# Altium PCB isokey_left.PcbDoc (part 4 of 5)
Units mm, origin at the board's own origin, x right, y up, seen from the top; angles counter-clockwise.
Board outline 154.06 x 134.15 mm, 2 copper layers (Top Layer, Bottom Layer), stack 1.569 mm thick; 140 components, 88 nets, 412 pads, 257 vias.
Unrouted connection lines stored in the file: 18.
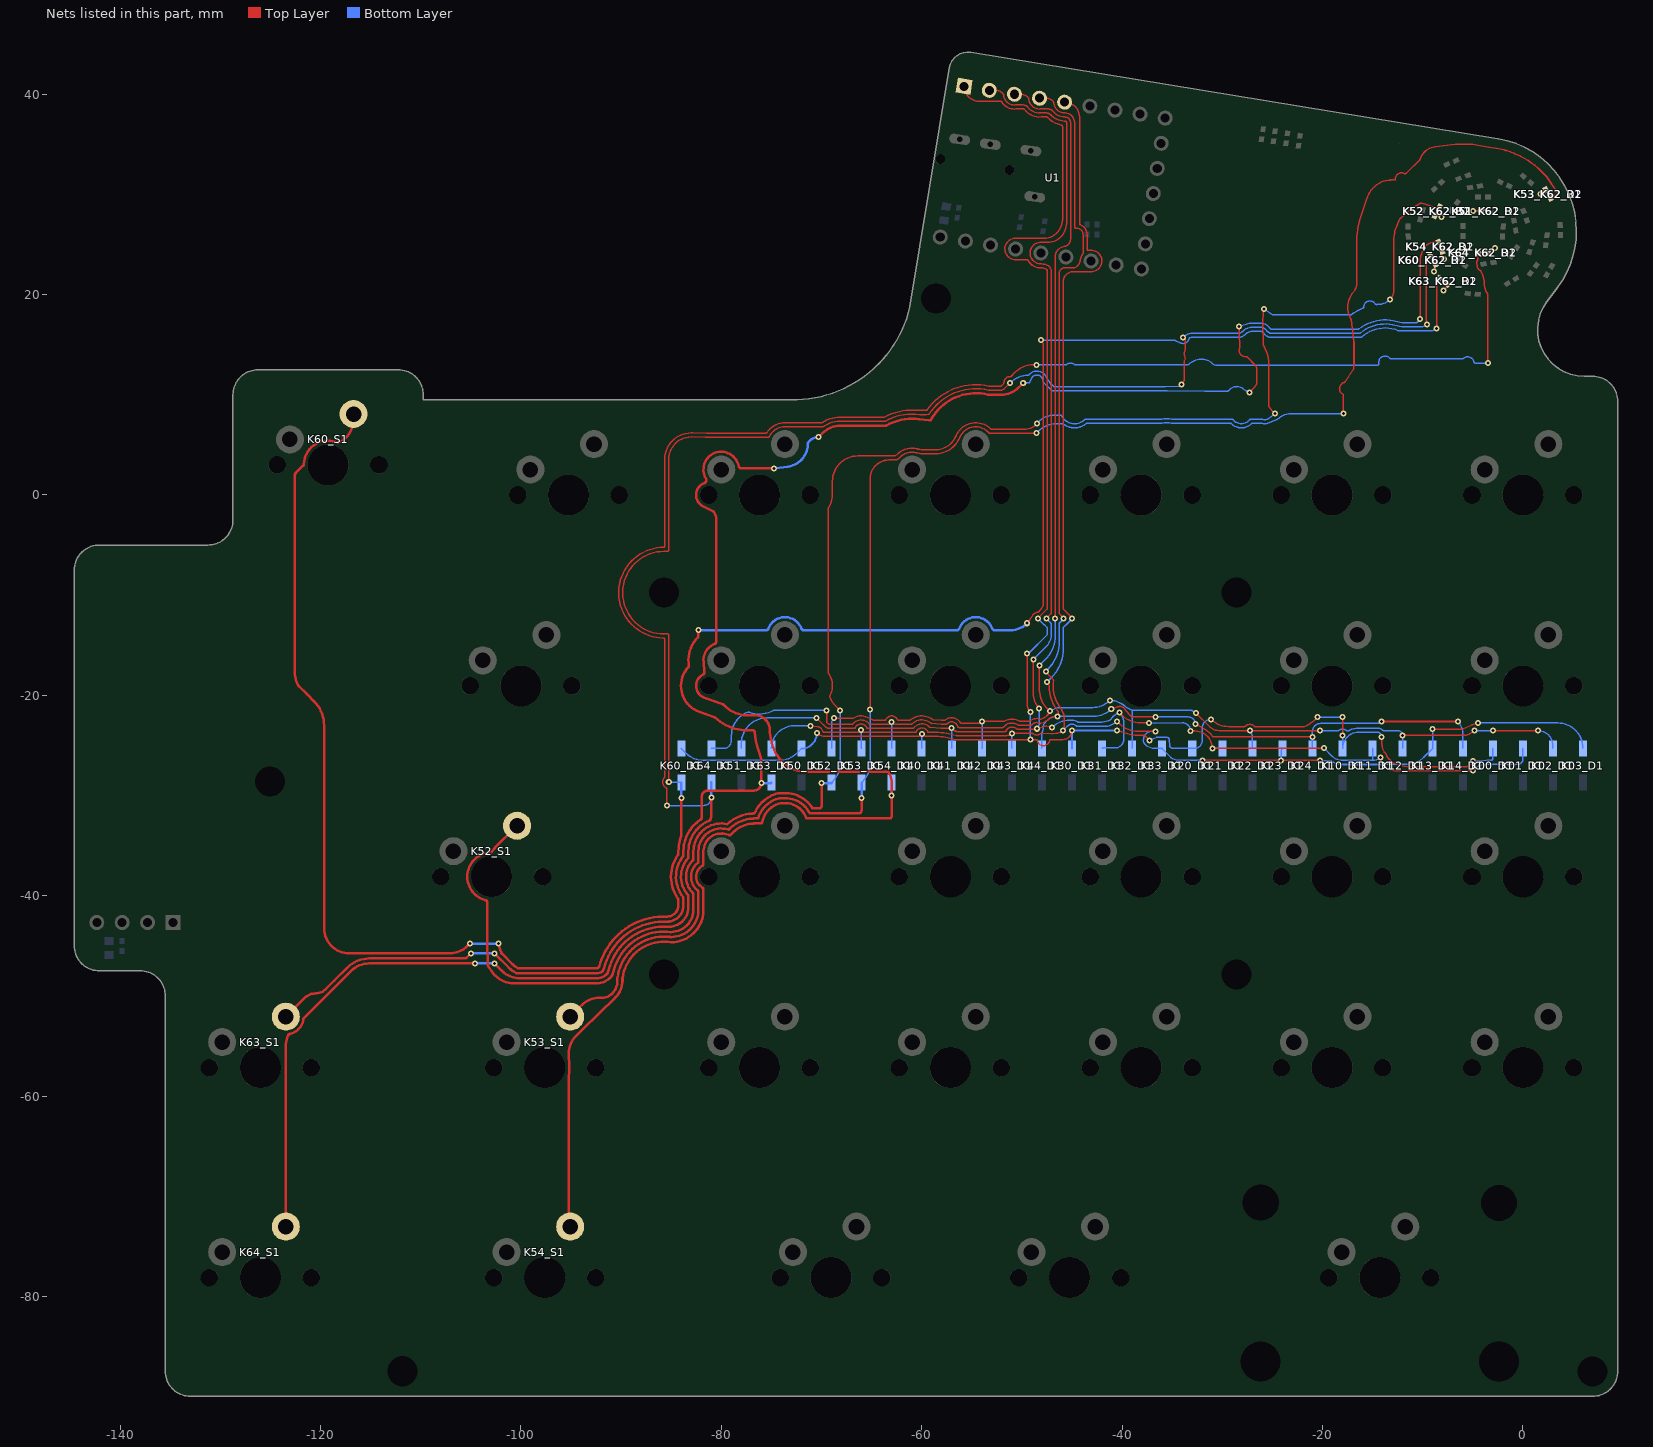
[diagram p4: the nets of this part, all layers, seen from the top]

## Via types
v1: diameter 0.6, hole 0.3, Top Layer to Bottom Layer, 257 vias

## Nets (pads, with @x,y where several pads share a name; then routed paths per layer and width w, separated by ;. In a path a pad name is that pad's centre, name@x,y a point inside that pad or via, vN(x,y) a via of type N, cw(c..) or ccw(c..) an arc to the next point about the centre after c; other vN are vias at no path point) (continued)
NetK51_K62_D2_1: K51_K62_D2.1 K51_K62_R1.2 | length 1.7
  Top Layer w0.15: v1(-4.991,28.359) -4.975,28.375 -4.151,28.375 K51_K62_D2.1@-4.144,28.382
  Bottom Layer w0.15: v1(-4.991,28.359) -4.975,28.375 -4.151,28.375 K51_K62_R1.2@-4.144,28.382
NetK52_D1_2: K52_D1.2 K52_K62_D2.2 K52_S1.2 | length 184.5
  Top Layer w0.15: v1(-68.136,-21.507) -68.579,-21.064 cw(c-66.783,-19.268) -69.162,-20.157 cw(c-69.021,-20.106) -69.155,-20.04 ccw(c-71.12,-19.05) -69.297,-17.818 cw(c-69.173,-17.735) -69.323,-17.736 -69.323,-1.314 cw(c-69.173,-1.315) -69.297,-1.232 ccw(c-71.12,0) -68.92,0 -68.92,1.36 cw(c-66.38,1.36) -66.38,3.9 -62.667,3.9 -62.292,4.201 cw(c-60.96,2.54) -60.703,4.653 cw(c-60.96,2.54) -60.395,4.593 ccw(c-59.873,6.472) -60.393,4.592 ccw(c-60.138,5.507) -60.391,4.592 ; -60.388,4.591 ccw(c-60.269,5.025) -60.385,4.59 ccw(c-60.137,5.507) -60.383,4.589 ccw(c-60.005,5.989) -60.38,4.589 ccw(c-59.873,6.472) -59.872,4.522 ; -59.871,4.522 -58.616,4.522 ccw(c-58.616,6.722) -56.587,5.87 ccw(c-58.385,6.626) -56.584,5.877 ccw(c-57.923,6.435) -56.584,5.879 ccw(c-57.46,6.244) -56.583,5.881 ccw(c-56.998,6.054) -56.582,5.883 ccw(c-57.46,6.244) -56.581,5.885 ; -56.579,5.89 cw(c-54.61,5.08) -56.385,6.256 cw(c-54.61,5.08) -53.792,7.045 cw(c-54.61,5.08) -53.124,6.605 ccw(c-53.021,6.713) -53.021,6.563 -49.82,6.563 ccw(c-49.82,8.594) -48.56,7.001 ccw(c-48.654,7.119) v1(-48.509,7.158) ; -25.929,17.955 -25.941,17.528 ccw(c-25.791,17.524) -25.941,17.522 -25.907,15.085 ccw(c-25.757,15.087) -25.896,15.03 -25.566,14.217 -25.562,14.207 cw(c-28.29,13.11) -25.35,13.11 -25.35,8.858 ccw(c-25.2,8.859) -25.326,8.777 ccw(c-23.21,10.182) -25.006,8.386 v1(-24.75,8.13) ; -25.928,17.956 cw(c-25.779,17.951) -25.928,17.968 v1(-25.858,18.556) ; v1(-13.275,19.495) ccw(c-14.209,20.429) -12.888,20.429 -12.888,25.504 cw(c-10.348,25.504) -12.863,25.858 -12.809,26.24 cw(c-11.695,26.084) -12.737,26.509 ; -12.736,26.51 -12.608,26.825 -12.39,27.358 cw(c-11.719,27.084) -12.201,27.625 -11.163,28.549 cw(c-11.064,28.437) -11.144,28.564 -10.319,29.08 cw(c-10.146,28.805) -10.2,29.126 cw(c-10.146,28.805) -10.062,29.119 -9.871,29.068 -9.579,28.989 cw(c-9.663,28.675) -9.554,28.981 -8.59,28.638 K52_K62_D2.2@-8.334,28.763
  Top Layer w0.25: K52_S1.2@-100.389,-33.014 -102.626,-35.251 ccw(c-102.449,-35.428) -102.64,-35.267 -102.908,-35.586 cw(c-103.1,-35.425) -103.083,-35.674 ccw(c-102.929,-38.094) -103.555,-40.437 cw(c-103.62,-40.679) -103.37,-40.678 -103.37,-45.603 cw(c-106.362,-46.137) -103.323,-46.137 -103.323,-46.75 ccw(c-102.648,-46.75) -103.207,-47.127 -102.929,-47.54 ccw(c-101.018,-46.252) -102.648,-47.882 -102.523,-48.006 ccw(c-100.727,-46.21) -100.727,-48.75 -92.494,-48.75 ccw(c-92.494,-46.757) -91.174,-48.25 -91.055,-48.131 ccw(c-92.059,-47.127) -90.944,-48.007 ccw(c-91.141,-47.853) -90.904,-47.931 -90.639,-47.128 ; -90.639,-47.127 cw(c-85.725,-48.75) -90.501,-46.757 cw(c-85.725,-48.75) -85.035,-43.621 ccw(c-85.035,-41.371) -82.785,-41.371 -82.785,-39.881 ccw(c-83.035,-39.881) -82.856,-39.707 -82.891,-39.671 cw(c-81.28,-38.1) -82.894,-39.668 cw(c-81.28,-38.1) -83.373,-38.926 cw(c-81.28,-38.1) -82.859,-36.497 ccw(c-83.035,-36.32) -82.785,-36.32 -82.785,-35.56 cw(c-80.01,-35.56) -79.415,-32.849 cw(c-76.686,-35.828) -76.889,-31.793 -76.868,-31.792 cw(c-76.719,-34.551) -76.719,-31.788 -76.694,-31.788 cw(c-73.66,-33.02) -75.743,-30.493 cw(c-73.66,-33.02) -75.375,-30.23 ; -75.374,-30.229 -75.164,-30.1 cw(c-73.969,-32.043) -74.107,-29.766 -73.867,-29.752 cw(c-73.66,-33.02) -70.88,-31.288 -70.25,-31.288 ccw(c-70.25,-31.038) -70,-31.038 v1(-70,-28.75)
  Bottom Layer w0.15: K52_D1.2@-69,-28.7 -68.89,-28.59 ccw(c-70.686,-26.794) -68.146,-26.794 -68.125,-22.28 ccw(c-68.75,-22.275) -68.125,-22.264 v1@-68.136,-21.502 ; v1@-68.14,-21.502 v1(-68.136,-21.507) ; v1(-48.509,7.158) -48.411,7.256 cw(c-46.615,5.46) -47.152,7.943 cw(c-47.121,7.796) -47.122,7.946 -46.149,7.946 cw(c-46.149,7.796) -46.022,7.876 -45.956,7.771 ccw(c-44.75,8.53) -45.905,7.696 ccw(c-44.75,8.53) -43.975,7.335 ccw(c-44.75,8.53) -43.752,7.513 cw(c-43.648,7.405) -43.648,7.555 -38.705,7.555 -36.094,7.555 ccw(c-36.094,7.705) -36.065,7.558 cw(c-35.56,5.08) -35.055,7.558 ccw(c-35.026,7.705) -35.026,7.555 -29.018,7.555 cw(c-29.019,7.405) -28.901,7.498 ccw(c-28.094,8.13) -27.287,7.498 cw(c-27.169,7.405) -27.17,7.555 -26.024,7.555 cw(c-26.024,7.405) -25.972,7.546 ccw(c-25.75,8.13) -25.359,7.642 v1(-24.75,8.13) ; v1(-25.858,18.556) -24.971,17.99 ccw(c-24.891,18.117) -24.891,17.967 -17.131,17.967 -16.956,18.142 ccw(c-16.957,18.292) -16.877,18.165 cw(c-13.76,13.244) -15.986,18.627 ; -15.985,18.628 ccw(c-16.043,18.766) -15.893,18.76 cw(c-15.268,18.742) -14.74,19.076 ccw(c-14.614,19.158) -14.594,19.009 ; -14.593,19.009 cw(c-13.76,13.244) -14.5,19.022 -14.497,19.022 cw(c-13.76,13.244) -14.074,19.061 ccw(c-14.084,19.21) -14.051,19.064 ccw(c-14.417,20.637) v1(-13.275,19.495)
  Bottom Layer w0.25: v1(-70,-28.75) -69.05,-28.75 K52_D1.2@-69,-28.7
NetK52_K62_D2_1: K52_K62_D2.1 K52_K62_R1.2 | length 1.4
  Top Layer w0.15: K52_K62_D2.1@-8.772,27.865 -8.54,27.941 v1(-8.138,27.745)
  Bottom Layer w0.15: K52_K62_R1.2@-8.768,27.873 -8.54,27.941 v1(-8.138,27.745)
NetK53_D1_2: K53_D1.2 K53_K62_D2.2 K53_S1.2 | length 175.4
  Top Layer w0.154: v1(-65.15,-21.399) -65.15,1.613 cw(c-63.265,1.613) -63.265,3.498 -62.665,3.498 ccw(c-62.667,4.05) -62.256,3.681 ccw(c-62.555,3.95) -62.255,3.683 cw(c-60.96,2.54) -60.759,4.255 cw(c-60.96,2.54) -60.753,4.255 ccw(c-60.703,4.653) -60.75,4.254 cw(c-60.96,2.54) -60.502,4.205 ccw(c-60.273,5.026) -60.501,4.205 ; -60.498,4.204 ccw(c-60.137,5.507) -60.495,4.203 ; -60.495,4.203 ccw(c-60.388,4.591) -60.493,4.203 ccw(c-60.269,5.025) -60.49,4.202 ccw(c-60.137,5.507) -60.487,4.201 ccw(c-60.005,5.989) -60.485,4.2 ccw(c-59.873,6.472) -59.872,4.12 ; -59.871,4.12 -58.616,4.12 ccw(c-58.616,6.722) -56.216,5.715 ccw(c-58.385,6.626) -56.213,5.722 ccw(c-57.923,6.435) -56.212,5.724 ccw(c-57.46,6.244) -56.211,5.727 ccw(c-56.998,6.054) -56.211,5.728 ccw(c-56.582,5.883) -56.21,5.73 ; -56.209,5.734 ccw(c-56.997,6.057) -56.208,5.735 ccw(c-57.459,6.248) -56.207,5.736 ; -56.207,5.737 cw(c-54.61,5.08) -56.155,5.851 cw(c-54.61,5.08) -54.61,6.807 cw(c-54.61,5.08) -53.263,6.161 -48.579,6.161 ccw(c-48.579,6.197) v1(-48.553,6.172) ; v1(-17.91,8.13) -17.91,9.942 ccw(c-18.064,9.942) -17.987,10.075 cw(c-17.675,10.619) -17.843,11.223 ccw(c-17.886,11.371) -17.758,11.285 -16.899,12.557 ccw(c-18.994,12.985) -16.856,12.985 -16.856,15.163 ccw(c-17.01,15.163) -16.857,15.182 -16.932,15.798 cw(c-16.533,15.847) -16.933,15.8 ; -16.933,15.802 -17.143,17.511 ccw(c-17.296,17.493) -17.164,17.573 cw(c-15.268,18.742) -17.058,20.066 -16.758,20.472 ccw(c-16.881,20.564) -16.743,20.495 ccw(c-18.322,21.271) -16.593,20.947 ccw(c-16.745,20.975) -16.591,20.974 -16.562,25.769 cw(c-11.62,25.758) -16.335,27.239 cw(c-11.62,25.758) -16.309,27.318 ; -16.309,27.319 -15.513,29.709 cw(c-13.112,28.91) -15.511,29.716 cw(c-15.129,29.589) -15.51,29.719 cw(c-13.112,28.91) -13.194,31.439 -13.084,31.443 cw(c-12.99,28.818) -12.732,31.432 cw(c-12.113,31.529) -11.818,32.082 ccw(c-11.747,32.219) -11.649,32.101 ccw(c-12.113,32.651) -11.604,32.142 -10.302,33.443 -10.2,33.678 cw(c-8.524,32.951) -8.73,34.766 -6.732,34.995 cw(c-6.621,34.05) -6.621,35.002 -5.129,35.002 cw(c-5.129,34.2) -4.999,34.991 -4.496,34.909 cw(c-4.647,33.969) -4.488,34.908 -3.384,34.727 -2.7,34.616 cw(c-2.853,33.676) -2.657,34.608 cw(c-2.739,34.214) -2.655,34.607 cw(c-2.821,33.823) -2.651,34.607 -1.873,34.439 cw(c-2.076,33.509) -1.823,34.427 cw(c-1.93,34.039) -1.821,34.426 cw(c-2.076,33.509) -1.786,34.415 cw(c-2.03,33.651) -1.78,34.414 -1.69,34.384 -1.598,34.354 -1.233,34.236 ; -1.231,34.236 cw(c-1.355,33.853) -1.23,34.236 cw(c-1.525,33.331) -1.185,34.22 -0.836,34.085 cw(c-1.034,33.57) -0.818,34.078 cw(c-0.976,33.708) -0.817,34.078 cw(c-0.974,33.708) -0.813,34.076 -0.572,33.97 -0.282,33.843 cw(c-0.503,33.337) -0.234,33.819 cw(c-0.43,33.468) -0.231,33.817 0.452,33.432 cw(c0.182,32.951) 0.501,33.401 0.684,33.272 0.912,33.111 0.95,33.083 1.161,32.934 cw(c1.072,32.808) 1.172,32.926 1.173,32.925 1.518,32.625 cw(c1.417,32.509) 1.526,32.618 2.378,31.766 3.417,30.206 cw(c3.288,30.121) 3.427,30.188 3.505,30.028 3.092,29.896 ccw(c3.139,29.749) 3.031,29.858 K53_K62_D2.2@2.766,29.594
  Top Layer w0.25: K53_S1.2@-95.086,-52.07 -93.949,-50.933 cw(c-92.153,-52.729) -92.153,-50.189 -91.904,-50.189 ccw(c-91.904,-48.775) -90.904,-49.775 ccw(c-92.201,-48.478) -90.367,-48.478 -90.367,-48.19 cw(c-85.725,-48.75) -85.102,-44.117 ; -85.1,-44.117 ccw(c-85.035,-43.621) -85.033,-44.121 ccw(c-85.035,-41.371) -82.315,-41.778 -82.285,-41.579 ; -82.285,-41.578 -82.285,-40.821 -82.285,-39.658 ccw(c-82.535,-39.658) -82.374,-39.466 -82.406,-39.44 cw(c-81.28,-38.1) -82.408,-39.438 cw(c-81.28,-38.1) -82.285,-36.667 -82.285,-35.56 cw(c-80.01,-35.56) -82.108,-34.681 cw(c-80.01,-35.56) -79.35,-33.383 -79.271,-33.407 -79.189,-33.325 cw(c-76.686,-35.828) -78.815,-33 cw(c-76.686,-35.828) -76.864,-32.293 -76.841,-32.291 cw(c-76.719,-34.551) -76.719,-32.288 -76.337,-32.288 -76.335,-32.282 ; -76.335,-32.282 cw(c-73.66,-33.02) -75.113,-30.656 -74.901,-30.526 cw(c-73.969,-32.043) -73.969,-30.262 cw(c-73.66,-33.02) -71.173,-31.788 -67.956,-31.788 cw(c-67.952,-32.788) -67.952,-31.788 -66.283,-31.788 ccw(c-66.284,-31.538) -66.041,-31.597 ccw(c-67.5,-31.25) -66,-31.25 v1(-66,-30.25)
  Bottom Layer w0.154: K53_D1.2@-66,-28.7 -65.894,-28.594 ccw(c-67.69,-26.798) -65.15,-26.798 v1(-65.15,-21.399) ; v1(-48.553,6.172) -48.362,6.363 cw(c-46.566,4.567) -46.566,7.107 -45.947,7.107 cw(c-45.948,6.953) -45.856,7.076 ccw(c-44.75,8.53) -44.665,6.705 ccw(c-44.75,8.53) -43.59,7.119 cw(c-43.493,6.999) -43.494,7.153 -36.31,7.153 -36.053,7.153 ccw(c-36.053,7.307) -36.02,7.157 cw(c-35.56,5.08) -35.1,7.157 ccw(c-35.067,7.307) -35.067,7.153 -29.199,7.153 cw(c-29.199,6.999) -29.092,7.11 ccw(c-28.094,8.13) -27.096,7.11 cw(c-26.989,6.999) -26.99,7.153 -26.089,7.153 cw(c-26.09,6.999) -26.046,7.147 ccw(c-25.75,8.13) -25.338,7.189 -24.5,7.555 ccw(c-24.75,8.13) -24.243,7.761 cw(c-24.119,7.67) -24.206,7.797 cw(c-23.112,6.167) -23.112,8.13 v1(-17.91,8.13)
  Bottom Layer w0.25: v1(-66,-30.25) K53_D1.2@-66,-28.7
NetK53_K62_D2_1: K53_K62_D2.1 K53_K62_R1.2 | length 1.9
  Top Layer w0.15: v1(1.748,30.021) 1.8,30.021 2.088,30.309 2.113,30.309 2.236,30.185 K53_K62_D2.1@2.279,30.467
  Bottom Layer w0.15: v1(1.748,30.021) 1.8,30.021 2.088,30.309 2.113,30.309 2.236,30.185 K53_K62_R1.2@2.279,30.467
NetK54_D1_2: K54_D1.2 K54_K62_D2.2 K54_S1.2 | length 217.1
  Top Layer w0.15: v1(-28.34,16.818) -28.288,16.23 cw(c-28.437,16.217) -28.287,16.218 ; -28.287,16.167 -28.257,14.762 ; -28.287,16.168 cw(c-28.137,16.17) -28.287,16.169 -28.287,16.217 ; -28.257,14.761 cw(c-28.407,14.76) -28.269,14.701 -28.28,14.676 ccw(c-27.705,14.43) -28.222,14.079 -28.221,14.078 ccw(c-28.097,14.163) -28.194,14.049 cw(c-28.593,13.567) -28.1,13.952 ccw(c-27.983,14.045) -28.072,13.925 ccw(c-27.705,14.43) -28.071,13.924 ccw(c-27.705,14.43) -27.668,13.807 -27.63,13.809 cw(c-27.621,13.659) -27.517,13.767 -27.516,13.766 -26.604,12.853 cw(c-28.69,12.378) -26.55,12.378 -26.55,11.153 cw(c-26.7,11.154) -26.571,11.078 cw(c-28.754,12.377) -26.957,10.581 v1(-27.287,10.251) ; v1(-10.249,17.554) -10.249,23.316 cw(c-7.877,23.316) -9.554,24.993 cw(c-8.683,23.685) -8.683,25.256 K54_K62_D2.2@-8.398,25.256
  Top Layer w0.25: -95.242,-58.417 -95.242,-72.649 ccw(c-94.709,-72.649) K54_S1.2@-95.086,-73.026 ; -95.242,-58.417 -95.202,-57.235 ccw(c-97.626,-57.15) -95.202,-57.071 -95.242,-55.786 cw(c-94.992,-55.778) -95.242,-55.778 cw(c-92.702,-55.778) -94.498,-53.982 -93.949,-53.433 ccw(c-95.086,-52.07) -93.847,-53.341 -90.57,-50.148 ccw(c-91.904,-48.775) -90.55,-50.128 ccw(c-92.201,-48.478) -90.275,-49.797 -90.206,-49.696 cw(c-89.999,-49.837) -90.177,-49.661 -90.176,-49.66 ccw(c-90.26,-49.576) -90.141,-49.576 ; -90.186,-49.656 ccw(c-92.201,-48.478) -89.867,-48.478 -89.867,-48.236 cw(c-89.617,-48.237) -89.865,-48.206 ; -89.864,-48.204 cw(c-85.725,-48.75) -86.981,-44.768 cw(c-85.725,-48.75) -85.037,-44.632 ; -85.036,-44.632 ccw(c-84.996,-44.386) -84.995,-44.636 ccw(c-85.016,-41.404) -81.874,-42.158 -81.785,-41.786 -81.785,-41.404 -81.785,-39.395 ccw(c-82.035,-39.396) -81.908,-39.181 cw(c-81.28,-38.1) -81.908,-37.019 ccw(c-82.035,-36.804) -81.785,-36.805 -81.785,-35.56 cw(c-80.01,-35.56) -79.496,-33.861 -79.272,-33.929 ccw(c-79.2,-33.689) -79.195,-33.939 -79.133,-33.938 cw(c-79.128,-34.188) -79.128,-33.938 -79.095,-33.938 -78.837,-33.68 cw(c-76.686,-35.828) -76.84,-32.792 -76.813,-32.791 cw(c-76.719,-34.551) -76.719,-32.788 -75.956,-32.788 -75.853,-32.416 cw(c-73.66,-33.02) -71.564,-32.137 ; v1(-74.736,2.667) -78.022,2.667 cw(c-78.02,2.917) -78.266,2.869 ccw(c-80.01,2.54) -81.37,3.681 ccw(c-80.01,2.54) -81.532,1.626 cw(c-81.746,1.498) -81.51,1.417 cw(c-83.91,2.249) -81.544,1.323 cw(c-81.777,1.415) -81.693,1.18 ccw(c-81.28,0) -82.529,0.037 ccw(c-81.28,0) -82.486,-0.329 ccw(c-81.28,0) -81.838,-1.119 ccw(c-81.28,0) -81.835,-1.12 ccw(c-81.28,0) -81.833,-1.121 -80.838,-1.612 cw(c-80.949,-1.836) -80.743,-1.694 cw(c-81.835,-2.445) -80.51,-2.445 -80.51,-4 -80.51,-12.321 -80.51,-14.629 cw(c-80.76,-14.629) -80.667,-14.861 ccw(c-80.01,-16.51) -81.78,-16.639 -81.704,-17.691 cw(c-81.953,-17.709) -81.838,-17.931 -81.839,-17.932 ccw(c-81.28,-19.05) -81.702,-20.227 -79.836,-20.895 cw(c-79.92,-21.131) -79.734,-20.964 cw(c-79.92,-21.131) -79.733,-20.965 ccw(c-77.47,-18.935) -77.47,-21.975 -76.656,-21.975 cw(c-76.656,-23.471) -75.16,-23.471 -75.16,-23.51 ccw(c-71.12,-23.51) -75.135,-23.958 ccw(c-71.12,-23.51) -74.948,-24.8 ccw(c-74.474,-24.642) -74.948,-24.802 -74.814,-25.198 ccw(c-74.34,-25.038) -74.814,-25.2 ccw(c-71.46,-24.066) -73.517,-26.947 ccw(c-73.225,-26.541) -73.515,-26.948 -73.385,-27.041 ccw(c-73.095,-26.634) -73.384,-27.042 ccw(c-71.62,-24.566) -71.62,-27.606 -63.471,-27.606 cw(c-63.472,-27.856) -63.251,-27.738 cw(c-65.138,-28.744) -63,-28.744 v1(-63,-30) -63,-32.038 cw(c-63.25,-32.038) -63.25,-32.288 -67.952,-32.288 ccw(c-67.952,-32.788) -67.955,-32.288 -71.506,-32.288 ccw(c-73.66,-33.02) -71.563,-32.138 ; v1(-70.292,5.791) -69.919,6.164 cw(c-68.122,4.368) -68.122,6.908 -63.606,6.908 ccw(c-63.619,7.158) -63.495,6.941 cw(c-60.96,2.54) -62.369,7.42 cw(c-60.96,2.54) -60.96,7.619 cw(c-60.96,2.54) -60.274,7.572 ccw(c-60.215,8.019) -60.253,7.57 -59.232,7.478 ; -59.232,7.483 -59.095,7.472 -58.991,7.649 cw(c-54.61,5.08) -55.937,9.983 -55.934,9.983 cw(c-54.61,5.08) -53.396,10.012 -52.098,10.012 ccw(c-52.098,12.552) -50.302,10.756 v1(-49.869,11.19)
  Bottom Layer w0.15: v1(-49.869,11.19) -49.342,11.19 ccw(c-49.342,11.34) -49.202,11.285 -49.091,11.57 cw(c-48.509,11.342) -47.884,11.344 ccw(c-47.734,11.345) -47.841,11.24 -46.983,10.382 -36.102,10.382 ccw(c-36.103,10.532) -36.089,10.383 cw(c-35.56,5.08) -35.484,10.408 -31.77,10.355 -29.513,10.355 ccw(c-29.513,10.505) -29.409,10.397 -29.264,10.538 cw(c-28.55,9.803) -27.921,10.613 -27.63,10.387 ccw(c-27.538,10.505) -27.538,10.355 cw(c-27.538,10) v1(-27.287,10.251) ; v1(-28.34,16.818) -27.466,17.084 cw(c-26.957,15.417) -26.957,17.16 -26.251,17.16 cw(c-26.251,15.96) -25.401,16.808 -25.181,16.587 ccw(c-25.074,16.692) -25.074,16.542 -16.452,16.542 ccw(c-16.453,16.692) -16.361,16.573 cw(c-13.76,13.244) -14.917,17.308 cw(c-13.76,13.244) -12.929,17.387 -12.3,17.261 -12.04,17.209 ccw(c-12.011,17.356) -12.011,17.206 -10.659,17.206 ccw(c-10.659,17.356) -10.553,17.249 v1(-10.249,17.554)
  Bottom Layer w0.25: v1(-74.736,2.667) -74.594,2.667 ccw(c-74.594,2.917) -74.562,2.669 -73.367,2.824 ccw(c-73.66,5.08) -71.495,4.382 ccw(c-73.66,5.08) -71.385,5.037 cw(c-71.135,5.031) -71.358,5.146 cw(c-70.292,4.588) v1(-70.292,5.791) ; v1(-63,-30) K54_D1.2@-63,-28.8
NetK54_K62_D2_1: K54_K62_D2.1 K54_K62_R1.2 | length 1.6
  Top Layer w0.15: K54_K62_D2.1@-8.056,24.317 -8.088,24.066 v1(-7.895,23.536)
  Bottom Layer w0.15: K54_K62_R1.2@-8.056,24.317 -8.088,24.066 v1(-7.895,23.536)
NetK60_D1_2: K60_D1.2 K60_K62_D2.2 K60_S1.2 | length 241.5
  Top Layer w0.15: v1(-85.25,-28.65) -85.25,-14.012 ccw(c-85.4,-14.013) -85.411,-13.863 cw(c-85.725,-9.75) -85.41,-5.637 ccw(c-85.4,-5.487) -85.25,-5.488 -85.25,3.567 cw(c-83.027,3.567) -83.027,5.791 -81.62,5.775 -78.621,5.775 ccw(c-78.621,8.715) -78.617,5.775 -75.333,5.777 ccw(c-75.333,5.927) -75.199,5.859 -75.188,5.88 cw(c-73.66,5.08) -73.659,6.805 cw(c-73.66,5.08) -73.624,6.805 ; -73.622,6.805 ccw(c-73.615,7.205) -73.614,6.805 -70.023,6.805 ccw(c-70.024,7.355) -70.021,6.805 -69.902,6.805 ccw(c-69.903,6.955) -69.819,6.831 cw(c-68.122,4.368) -69.73,6.89 ; -69.729,6.89 cw(c-68.122,4.368) -68.122,7.358 -63.71,7.358 ccw(c-63.711,7.508) -63.639,7.377 cw(c-60.96,2.54) -62.155,7.938 cw(c-60.96,2.54) -60.215,8.019 -59.836,8.019 ccw(c-59.836,10.559) -59.31,8.074 ccw(c-59.342,8.22) -59.217,8.136 cw(c-54.61,5.08) -57.935,9.497 cw(c-54.61,5.08) -56.055,10.417 cw(c-55.937,9.983) -56.054,10.417 cw(c-54.61,5.08) -53.359,10.466 ccw(c-53.326,10.612) -53.326,10.462 -52.098,10.462 ccw(c-52.098,12.552) -52.071,10.462 ccw(c-52.098,12.552) -52.07,10.462 ccw(c-52.073,10.612) -52.016,10.473 -51.832,10.549 ccw(c-51.889,10.688) -51.783,10.581 v1(-51.175,11.19) ; v1(-34.085,11.013) ccw(c-35.156,12.085) -33.839,11.335 ccw(c-33.97,11.409) -33.82,11.408 -33.82,12.98 cw(c-31.861,12.98) -33.72,13.598 ccw(c-33.862,13.645) -33.723,13.702 cw(c-32.774,14.088) -33.717,14.488 ccw(c-33.856,14.546) -33.706,14.546 -33.706,15.592 ccw(c-33.856,15.592) -33.856,15.742 v1(-33.931,15.742) ; v1(-9.579,17.031) cw(c-9.474,17.138) -9.624,17.137 -9.624,22.928 cw(c-8.273,22.928) K60_K62_D2.2@-9.228,23.884
  Top Layer w0.25: K60_S1.2@-116.71,8.08 -116.71,7.54 cw(c-119.25,7.54) -118.141,5.255 cw(c-118.249,5.481) -118.341,5.248 ccw(c-119.25,3) -119.25,5.425 ccw(c-119.25,3) -121.673,3.095 cw(c-121.923,3.106) -121.745,2.93 -122.487,2.188 ccw(c-122.31,2.011) -122.56,2.011 -122.56,-17.888 ccw(c-120.52,-17.888) -122.209,-19.032 ccw(c-122.003,-18.891) -122.181,-19.066 -121.373,-19.873 -120.642,-20.605 cw(c-123.023,-22.99) -119.653,-22.99 -119.653,-43.217 ccw(c-117.113,-43.217) -117.113,-45.757 -115.158,-45.757 -107.134,-45.757 ccw(c-107.134,-43.217) -105.338,-45.013 v1(-105.093,-44.769) ; v1(-102.25,-44.75) -102.003,-45.548 cw(c-102.648,-45.75) -101.981,-45.643 ccw(c-101.734,-45.603) -101.912,-45.778 -100.856,-46.835 ccw(c-99.414,-45.391) -100.318,-47.22 ccw(c-100.209,-46.995) -100.233,-47.244 ccw(c-100.095,-45.71) -100.095,-47.25 -98.573,-47.25 -93.445,-47.25 -92.494,-47.25 ccw(c-92.494,-46.757) -92.379,-47.236 ccw(c-92.438,-46.994) -92.201,-47.072 -92.064,-46.659 ; -92.064,-46.658 cw(c-90.639,-47.128) -92.064,-46.657 cw(c-85.725,-48.75) -91.886,-46.18 cw(c-85.725,-48.75) -91.581,-45.545 cw(c-85.725,-48.75) -89.223,-43.065 cw(c-85.725,-48.75) -85.424,-42.082 ccw(c-85.424,-40.943) -84.285,-40.943 -84.285,-40.425 ccw(c-84.535,-40.425) -84.331,-40.28 cw(c-81.28,-38.1) -84.331,-35.92 ccw(c-84.535,-35.775) -84.285,-35.775 -84.285,-35.56 cw(c-80.01,-35.56) -84.211,-34.77 cw(c-80.01,-35.56) -84.016,-34.066 ccw(c-84.25,-33.98) -84,-33.98 v1(-84,-30.25)
  Bottom Layer w0.15: v1(-85.25,-28.65) -84.05,-28.65 cw(c-84.05,-28.7) K60_D1.2@-84,-28.7 ; v1(-51.175,11.19) -51.152,11.212 cw(c-49.356,9.416) -49.356,11.956 -49.319,11.981 ccw(c-49.402,12.106) -49.288,12.008 cw(c-48.509,11.342) -48.318,12.349 cw(c-48.509,11.342) -47.646,11.895 -47.132,11.097 ; -47.132,11.097 ccw(c-45.422,12.806) -46.783,10.808 ccw(c-46.699,10.932) -46.7,10.782 -36.875,10.782 -35.689,10.808 cw(c-35.56,5.08) -35.678,10.808 -34.334,10.837 ccw(c-34.337,10.987) -34.243,10.87 ccw(c-35.609,12.538) v1(-34.085,11.013) ; v1(-33.931,15.742) cw(c-32.965,14.777) -32.965,16.142 -29.582,16.142 cw(c-29.583,15.992) -29.525,16.131 ; -29.524,16.13 ccw(c-29.467,16.269) -29.441,16.121 cw(c-29.211,14.862) -29.211,16.142 -28.31,16.142 ccw(c-28.31,16.292) -28.237,16.161 -28.039,16.27 ccw(c-28.34,16.818) -27.911,16.363 -27.907,16.367 ccw(c-28.01,16.476) -27.905,16.369 ; -27.904,16.37 cw(c-26.957,15.417) -26.957,16.76 -26.251,16.76 cw(c-26.251,15.96) -25.685,16.526 -25.461,16.302 ccw(c-25.074,16.692) -25.389,16.242 -25.286,16.169 ccw(c-25.2,16.292) -25.2,16.142 -16.311,16.142 ccw(c-16.311,16.292) -16.216,16.177 cw(c-13.76,13.244) -14.244,17.038 cw(c-13.76,13.244) -13.009,16.995 -12.08,16.809 ccw(c-12.05,16.956) -12.05,16.806 -10.122,16.806 ccw(c-10.122,17.574) v1(-9.579,17.031)
  Bottom Layer w0.25: v1(-105.093,-44.769) -102.269,-44.769 ccw(c-102.269,-44.75) v1(-102.25,-44.75) ; v1(-84,-30.25) K60_D1.2@-84,-28.7
NetK60_K62_D2_1: K60_K62_D2.1 K60_K62_R1.2 | length 1.5
  Top Layer w0.15: v1(-8.886,22.322) -8.886,22.444 -8.764,22.566 -8.764,22.982 K60_K62_D2.1@-8.728,23.018
  Bottom Layer w0.15: v1(-8.886,22.322) -8.886,22.444 -8.764,22.566 -8.764,22.982 K60_K62_R1.2@-8.728,23.018
NetK63_D1_2: K63_D1.2 K63_K62_D2.2 K63_S1.2 | length 196.2
  Top Layer w0.15: v1(-49.473,-12.802) -48.898,-11.969 cw(c-48.384,-12.323) -48.423,-11.7 ccw(c-48.433,-11.55) -48.327,-11.656 ccw(c-50.14,-9.877) -47.901,-11.076 ccw(c-48.034,-11.006) -47.884,-11.007 -47.884,14.942 ccw(c-48.652,14.942) v1(-48.109,15.485) ; v1(-8.606,16.631) -8.606,20.992 cw(c-7.666,20.992) K63_K62_D2.2@-8.331,21.657
  Top Layer w0.25: K63_S1.2@-123.472,-52.07 -121.614,-50.211 cw(c-120.5,-51.325) -120.5,-49.75 ccw(c-120.5,-48.325) -119.492,-49.333 -118.638,-48.478 -117.309,-47.149 cw(c-115.158,-49.297) -115.158,-46.257 -105.611,-46.257 ccw(c-105.611,-46.007) -105.435,-46.185 v1(-105,-45.75) ; v1(-102.648,-45.75) -101.21,-47.187 ccw(c-99.414,-45.391) -100.449,-47.711 ccw(c-100.348,-47.482) -100.385,-47.729 ccw(c-100.095,-45.71) -100.095,-47.75 -92.494,-47.75 ccw(c-92.494,-46.757) -91.865,-47.525 ccw(c-92.024,-47.332) -91.848,-47.51 -91.845,-47.507 ccw(c-92.022,-47.331) -91.785,-47.409 -91.747,-47.295 -91.59,-46.816 ; -91.589,-46.814 cw(c-85.725,-48.75) -88.656,-43.315 cw(c-85.725,-48.75) -85.394,-42.584 ccw(c-85.394,-40.975) -83.785,-40.975 -83.785,-40.259 ccw(c-84.035,-40.259) -83.838,-40.105 cw(c-81.28,-38.1) -84.135,-39.652 cw(c-81.28,-38.1) -83.938,-36.229 cw(c-81.28,-38.1) -83.838,-36.095 ccw(c-84.035,-35.941) -83.785,-35.941 -83.785,-35.56 cw(c-80.01,-35.56) -83.295,-33.701 cw(c-80.01,-35.56) -82.066,-32.394 ccw(c-82.203,-32.185) -81.953,-32.185 -81.953,-30.129 cw(c-81.324,-30.129) -81.324,-29.5 -76.75,-29.5 ccw(c-76.75,-28.75) v1(-76,-28.75) -76,-26.416 ccw(c-76.25,-26.416) -76.013,-26.336 -76.325,-25.413 -76.369,-25.281 cw(c-75.895,-25.122) -76.369,-25.28 cw(c-75.422,-24.962) -76.37,-25.278 ; v1(-82.285,-13.5) -82.285,-14.051 cw(c-82.535,-14.05) -82.355,-14.224 ccw(c-80.01,-16.51) -83.277,-16.745 ccw(c-82.778,-16.711) -83.276,-16.748 -83.257,-17.021 cw(c-83.506,-17.039) -83.32,-17.206 ccw(c-81.28,-19.05) -84.03,-19.05 ccw(c-81.28,-19.05) -82.211,-21.638 ccw(c-81.87,-20.697) -82.209,-21.638 ccw(c-82.039,-21.168) -82.208,-21.639 -80.684,-22.185 cw(c-80.769,-22.42) -80.608,-22.228 -80.384,-22.417 ccw(c-77.47,-18.935) -78.344,-23.39 ccw(c-77.47,-18.935) -77.47,-23.475 -76.905,-23.475 cw(c-76.906,-23.725) -76.656,-23.715 ccw(c-71.12,-23.51) -76.37,-25.278
  Bottom Layer w0.15: v1(-48.109,15.485) -48.049,15.424 -34.71,15.424 -34.679,15.41 -34.203,15.179 ccw(c-33.931,15.742) -33.322,15.6 cw(c-33.176,15.564) -33.216,15.709 cw(c-32.965,14.777) -32.965,15.742 -31.006,15.742 -29.476,15.719 ccw(c-29.467,16.269) -29.461,15.719 -28.293,15.733 ccw(c-28.295,15.883) -28.257,15.738 -28.171,15.76 ccw(c-28.31,16.292) -28.045,15.81 ; -28.045,15.81 -27.846,15.919 ccw(c-28.039,16.27) -27.843,15.921 ccw(c-28.34,16.818) -27.637,16.071 ccw(c-27.911,16.363) -27.636,16.072 -27.632,16.076 ; -27.631,16.077 ccw(c-28.01,16.476) -27.626,16.082 ccw(c-27.905,16.369) -27.624,16.084 ccw(c-27.729,16.191) -27.623,16.085 cw(c-26.957,15.417) -26.957,16.36 -26.251,16.36 cw(c-26.251,15.96) -25.969,16.244 -25.743,16.018 ; -25.742,16.017 ccw(c-25.074,16.692) -25.621,15.916 ccw(c-25.389,16.242) -25.619,15.914 -25.516,15.842 ccw(c-25.286,16.169) -25.514,15.841 ccw(c-25.2,16.292) -25.2,15.742 -16.161,15.742 ccw(c-16.162,15.892) -16.062,15.781 cw(c-13.76,13.244) -12.469,16.416 ccw(c-12.413,16.556) -12.414,16.406 -9.149,16.406 ccw(c-9.149,17.174) v1(-8.606,16.631)
  Bottom Layer w0.25: v1(-105,-45.75) v1(-102.648,-45.75) ; v1(-82.285,-13.5) -75.552,-13.5 ccw(c-75.553,-13.25) -75.319,-13.34 cw(c-73.66,-13.97) -72.001,-13.34 ccw(c-71.767,-13.25) -71.768,-13.5 -56.502,-13.5 ccw(c-56.503,-13.25) -56.269,-13.34 cw(c-54.61,-13.97) -52.951,-13.34 ccw(c-52.717,-13.25) -52.718,-13.5 -51.159,-13.5 ccw(c-51.159,-11.115) v1(-49.473,-12.802) ; v1(-76,-28.75) -75.05,-28.75 K63_D1.2@-75,-28.7
NetK63_K62_D2_1: K63_K62_D2.1 K63_K62_R1.2 | length 1.5
  Top Layer w0.15: v1(-7.928,20.422) -7.717,20.632 ccw(c-8.114,21.029) K63_K62_D2.1@-7.553,21.029
  Bottom Layer w0.15: v1(-7.928,20.422) -7.717,20.632 ccw(c-8.114,21.029) K63_K62_R1.2@-7.553,21.029
NetK64_D1_2: K64_D1.2 K64_K62_D2.2 K64_S1.2 | length 222.3
  Top Layer w0.15: v1(-85.442,-31) -85.442,-29.344 ccw(c-85.592,-29.345) -85.526,-29.211 cw(c-85.25,-28.65) -85.693,-28.209 ccw(c-85.8,-28.104) -85.65,-28.105 -85.65,-14.424 ccw(c-85.8,-14.424) -85.797,-14.274 cw(c-85.725,-9.75) -87.162,-14.041 cw(c-85.725,-9.75) -85.725,-5.225 ccw(c-85.8,-5.095) -85.65,-5.096 -85.65,3.567 cw(c-83.027,3.567) -83.027,6.191 -82.859,6.191 -81.454,6.175 -78.616,6.175 -75.562,6.177 ccw(c-75.563,6.327) -75.438,6.244 cw(c-73.66,5.08) -73.615,7.205 -70.023,7.205 ccw(c-70.024,7.355) -69.944,7.228 cw(c-68.122,4.368) -69.173,7.592 cw(c-68.122,4.368) -68.122,7.758 -63.811,7.758 ccw(c-63.812,7.908) -63.742,7.776 cw(c-60.96,2.54) -62.243,8.328 ; -62.243,8.329 cw(c-60.96,2.54) -60.513,8.452 ccw(c-60.502,8.602) -60.503,8.452 -59.564,8.452 ccw(c-59.565,8.602) -59.443,8.514 cw(c-54.61,5.08) -56.69,10.632 cw(c-54.61,5.08) -56.16,10.803 cw(c-55.937,9.983) -56.158,10.803 cw(c-54.61,5.08) -53.297,10.862 -52.153,10.862 ccw(c-52.153,11.012) -52.096,10.873 -52.057,10.889 ccw(c-52.115,11.027) -52.009,10.921 -51.797,11.133 cw(c-51.175,11.19) -51.176,11.815 ccw(c-51.178,11.965) -51.072,11.858 -50.683,12.247 cw(c-48.886,10.451) -48.886,12.991 v1(-48.56,12.991) ; K64_K62_D2.2@-4.499,24.176 -4.499,23.513 -4.564,23.36 ccw(c-4.266,23.232) -4.589,23.202 -4.554,22.812 -4.483,22.625 ccw(c-4.179,22.74) -4.283,22.432 cw(c-4.332,22.29) -4.205,22.369 cw(c-6.251,21.116) -3.861,21.334 cw(c-4.011,21.321) -3.861,21.31 ccw(c-1.942,21.162) -3.851,20.919 ccw(c-1.942,21.162) -3.612,20.205 ccw(c-2.57,20.8) -3.61,20.202 ; -3.61,20.202 -3.519,20.042 cw(c-3.649,19.968) -3.499,19.968 v1(-3.499,13.167)
  Top Layer w0.25: K64_S1.2@-123.472,-71.711 -123.472,-55.025 cw(c-120.932,-55.025) -123.225,-53.93 cw(c-123,-54.039) -123.059,-53.796 ccw(c-123.472,-52.07) -121.707,-52.254 -116.954,-47.501 cw(c-115.158,-49.297) -115.158,-46.757 v1(-104.566,-46.757) ; v1(-102.648,-46.75) -101.891,-47.506 ccw(c-100.095,-45.71) -100.095,-48.25 -92.494,-48.25 ccw(c-92.494,-46.757) -91.522,-47.89 ccw(c-91.686,-47.701) -91.51,-47.879 -91.409,-47.778 ccw(c-92.059,-47.127) -91.407,-47.776 ccw(c-91.585,-47.6) -91.347,-47.678 -91.198,-47.225 -91.115,-46.973 cw(c-85.725,-48.75) -91.114,-46.971 ; -91.114,-46.971 cw(c-85.725,-48.75) -86.202,-43.095 cw(c-85.725,-48.75) -85.248,-43.095 ccw(c-85.248,-41.132) -83.285,-41.132 -83.285,-39.982 cw(c-81.28,-38.1) -83.529,-36.517 cw(c-81.28,-38.1) -83.285,-36.218 -83.285,-35.56 cw(c-80.01,-35.56) -81.854,-32.854 cw(c-80.01,-35.56) -81.23,-32.521 ccw(c-81.324,-32.289) -81.105,-32.41 ccw(c-81.854,-31.999) -81,-31.999 v1(-81,-30.2)
  Bottom Layer w0.15: v1(-85.442,-31) -81.8,-31 ccw(c-81.8,-30.2) v1(-81,-30.2) ; v1(-48.56,12.991) ccw(c-48.532,13.019) -48.532,12.98 -45.654,12.98 ccw(c-45.655,13.13) -45.558,13.016 cw(c-45.15,12.542) -44.742,13.016 ccw(c-44.645,13.13) -44.646,12.98 -33.42,12.98 cw(c-31.936,11.496) -32.275,13.567 -32.187,13.567 -32.048,13.567 cw(c-32.044,12.142) -31.036,13.15 ccw(c-30.535,13.651) -30.535,12.942 -14.519,12.942 ccw(c-14.52,13.092) -14.373,13.121 cw(c-13.76,13.244) -13.29,13.656 ccw(c-13.178,13.756) -13.179,13.606 -6.009,13.606 ccw(c-6.01,13.756) -5.913,13.641 cw(c-5.506,13.167) -4.893,13.287 ccw(c-4.746,13.317) -4.747,13.167 v1(-3.499,13.167)
  Bottom Layer w0.25: v1(-104.566,-46.757) -102.757,-46.757 -102.75,-46.75 v1(-102.648,-46.75) ; v1(-81,-30.2) K64_D1.2@-81,-28.65
NetK64_K62_D2_1: K64_K62_D2.1 K64_K62_R1.2 | length 1.8
  Top Layer w0.15: K64_K62_D2.1@-3.499,24.176 -3.449,24.176 -3.044,24.58 -2.864,24.58 v1(-2.778,24.666)
  Bottom Layer w0.15: K64_K62_R1.2@-3.499,24.176 -3.449,24.176 -3.044,24.58 -2.864,24.58 v1(-2.778,24.666)
R0: K00_D1.1 K10_D1.1 K20_D1.1 K30_D1.1 K40_D1.1 K50_D1.1 K60_D1.1 U1.0 | length 180.9
  Top Layer w0.15: v1(-70.471,-23.75) ccw(c-69.627,-22.905) -69.627,-24.1 -60.527,-24.1 ccw(c-60.527,-23.332) v1(-59.983,-23.875) ccw(c-59.44,-23.332) -59.44,-24.1 -58.34,-24.1 cw(c-58.34,-27.389) -57.61,-24.182 -56.605,-24.409 ; -56.605,-24.409 v1(-49.15,-24.409) -48.608,-24.409 cw(c-48.608,-24.559) -48.461,-24.53 ccw(c-47.847,-24.409) -47.234,-24.529 cw(c-47.087,-24.559) -47.087,-24.409 -45.909,-24.409 ccw(c-45.909,-23.5) -45.218,-24.09 ccw(c-45.909,-23.5) -45.216,-24.089 ccw(c-45.331,-23.992) -45.19,-24.044 ; U1.0@-55.768,40.791 ccw(c-54.278,40.791) -54.278,39.3 -52.137,39.3 cw(c-52.138,39.15) -52.011,39.229 ccw(c-50.751,39.996) -50.9,38.529 ccw(c-50.751,39.996) -50.608,38.528 cw(c-50.594,38.379) -50.595,38.529 -49.858,38.529 cw(c-49.858,38.379) -49.739,38.47 ccw(c-48.242,39.599) -48.723,37.787 ccw(c-48.242,39.599) -48.091,37.73 cw(c-48.079,37.581) -48.08,37.731 -47.536,37.731 cw(c-47.537,37.581) -47.426,37.681 ccw(c-45.734,39.202) -46.436,37.038 -46.054,36.914 cw(c-46.1,36.772) -45.95,36.772 -45.95,27.497 cw(c-47.825,27.497) -47.825,25.622 ; v1(-49.473,-15.834) -49.473,-20.866 ccw(c-48.371,-20.866) v1(-49.15,-21.645) ; v1(-48.384,-12.323) -48.384,-12.29 -47.484,-11.39 -47.484,22.396 ccw(c-47.634,22.395) -47.554,22.522 ccw(c-48.079,21.676) -48.079,22.672 -48.174,22.675 cw(c-48.118,24.149) -49.391,23.405 ccw(c-49.52,23.329) -49.519,23.479 -50.494,23.479 ccw(c-50.493,23.329) -50.509,23.478 cw(c-50.626,24.547) -50.751,23.479 cw(c-50.626,24.547) -51.235,23.661 cw(c-50.626,24.547) -51.701,24.526 cw(c-50.626,24.547) -50.626,25.622 -48.21,25.622 ccw(c-48.21,25.772) -48.203,25.622 cw(c-48.118,24.149) -48.101,25.624 -47.827,25.622 ; -45.19,-24.043 v1(-44.994,-23.514) ; v1(-40.5,-23.5) -39.291,-23.865 ccw(c-38.442,-21.05) -38.442,-23.99 -37.835,-23.99 cw(c-37.836,-24.14) -37.746,-24.021 ; -37.745,-24.021 cw(c-39.286,-26.04) -37.49,-24.244 v1(-37.25,-24.484) ; v1(-31.12,-22.392) ccw(c-29.374,-20.646) -29.374,-23.115 -27.804,-23.115 ccw(c-27.805,-22.965) -27.7,-23.072 cw(c-27.259,-23.515) -26.818,-23.072 ccw(c-26.713,-22.965) -26.714,-23.115 -21.88,-23.115 ccw(c-21.881,-22.965) -21.837,-23.109 ccw(c-22.602,-20.687) -20.806,-22.483 v1(-20.5,-22.177) ; v1(-18,-24.002) v1(-18,-22.177) ; v1(-14.096,-24.14) -14.096,-24.56 ccw(c-11.556,-24.56) -13.86,-25.63 ccw(c-13.724,-25.566) -13.816,-25.685 cw(c-14.194,-26.182) -13.579,-26.069 ccw(c-13.432,-26.041) -13.551,-26.133 ccw(c-11.556,-24.56) -11.556,-27.1 -10.385,-27.1 -6.728,-27.1 -5.545,-27.1 ccw(c-5.546,-26.95) -5.441,-27.057 cw(c-5,-27.5) -5.141,-26.891 ccw(c-5.176,-26.745) -5.031,-26.784 ccw(c-5.958,-26.542) v1(-5,-26.542)
  Bottom Layer w0.15: K60_D1.1@-84,-25.3 -83.544,-25.756 ccw(c-81.748,-23.96) -81.748,-26.5 -80.658,-26.5 ; -80.683,-26.498 -80.673,-26.499 ccw(c-80.658,-26.35) -80.658,-26.5 ; K50_D1.1@-72,-25.3 -72.456,-25.756 cw(c-74.252,-23.96) -74.252,-26.5 -80.658,-26.5 ; K40_D1.1@-60,-25.3 -59.983,-25.3 v1(-59.983,-23.875) ; v1(-49.473,-15.834) ccw(c-49.473,-15.534) -49.26,-15.746 -47.484,-13.97 -47.484,-13.223 -47.759,-12.948 -47.793,-12.948 -48.384,-12.357 v1(-48.384,-12.323) ; v1(-49.15,-24.409) v1(-49.15,-21.645) ; v1(-37.25,-24.484) -36.562,-24.202 ccw(c-36.688,-23.59) -36.467,-24.175 -35.6,-24.175 cw(c-35.6,-24.5) -35.275,-24.484 -35.25,-25 ccw(c-34.95,-25) -34.95,-25.3 K20_D1.1@-33,-25.3 -32.8,-25.3 ccw(c-32.8,-24.5) -32,-24.5 -32,-23.273 cw(c-31.12,-23.273) v1(-31.12,-22.392) ; v1(-20.5,-22.177) v1(-18,-22.177) ; v1(-18,-24.002) K10_D1.1@-18,-25.3 cw(c-16.365,-25.3) -16.365,-23.665 -14.571,-23.665 cw(c-14.571,-24.14) v1(-14.096,-24.14) ; v1@-4.999,-26.542 -3.615,-26.483 cw(c-3.505,-28.995) -3.578,-26.482 -3.144,-26.465 ccw(c-3.15,-26.316) -3,-26.316 K00_D1.1@-3,-25.3
  Bottom Layer w0.2: K50_D1.1@-72,-25.3 ccw(c-72,-23.771) -70.471,-23.771 v1(-70.471,-23.75) ; K30_D1.1@-45,-25.3 -45,-23.7 cw(c-44.8,-23.7) -45,-23.694 v1(-44.994,-23.514) v1@-44.994,-23.507 ; v1@-45,-23.507 -45,-23.5 v1(-40.5,-23.5)
R1: K01_D1.1 K11_D1.1 K21_D1.1 K31_D1.1 K41_D1.1 K51_D1.1 U1.1 | length 170.7
  Top Layer w0.15: v1(-70.5,-22.25) -69.794,-22.956 ccw(c-67.998,-21.16) -69.404,-23.275 ccw(c-69.322,-23.15) -69.323,-23.3 -67.377,-23.3 -66.763,-23.3 ccw(c-66.764,-23.15) -66.628,-23.213 cw(c-66.06,-23.475) -65.493,-23.214 ccw(c-65.357,-23.15) -65.358,-23.3 -60.907,-23.3 ccw(c-60.908,-23.15) -60.79,-23.243 cw(c-59.983,-23.875) -59.259,-23.15 ; -59.258,-23.151 ccw(c-59.153,-23.044) -59.167,-23.193 -58.086,-23.299 ccw(c-58.071,-23.15) -58.071,-23.3 -57.115,-23.3 ccw(c-57.115,-23.15) v1(-57.018,-23.265) ; v1(-57.018,-23.265) ccw(c-55.222,-21.469) -56.653,-23.568 ccw(c-56.569,-23.443) -56.603,-23.589 -56.531,-23.605 ccw(c-56.499,-23.459) -56.499,-23.609 -53.189,-23.609 -51.703,-23.609 ccw(c-51.704,-23.459) -51.568,-23.523 cw(c-51,-23.784) -50.682,-23.246 -50.446,-23.384 ; U1.1@-53.26,40.394 -52.621,40.394 cw(c-52.621,39.449) -51.85,39.996 cw(c-51.973,39.909) -51.823,39.92 ccw(c-50.751,39.996) -51.676,39.449 ccw(c-50.751,39.996) -50.9,38.932 ccw(c-50.751,39.996) -50.647,38.926 cw(c-50.608,38.528) -50.643,38.927 cw(c-50.594,38.379) -50.598,38.929 cw(c-50.595,38.529) -50.595,38.929 -49.858,38.929 cw(c-49.858,38.379) -49.421,38.713 cw(c-49.739,38.47) -49.42,38.711 ccw(c-48.242,39.599) -49.259,38.531 ccw(c-48.242,39.599) -48.103,38.131 -47.537,38.131 cw(c-47.537,37.581) -47.132,37.952 cw(c-47.426,37.681) -47.129,37.95 ; -50.445,-23.384 -49.056,-23.384 ccw(c-49.056,-23.234) -49.052,-23.384 -49.011,-23.383 ccw(c-49.096,-20.044) -47.746,-23.099 cw(c-47.586,-23.466) -47.744,-23.098 cw(c-47.526,-23.603) -47.595,-23.057 v1(-46.994,-23.193) ; v1(-48.848,-16.435) -48.871,-17.011 ccw(c-48.247,-17.036) -48.872,-17.035 -48.872,-19.791 ccw(c-46.738,-19.791) -48.614,-20.808 -48.613,-20.81 ccw(c-48.482,-20.737) -48.607,-20.819 v1(-48.279,-21.323) ; v1(-47.534,-12.323) -47.534,-12.29 -47.084,-11.84 -47.084,22.395 ccw(c-47.634,22.395) -47.084,22.398 ccw(c-47.634,22.395) -47.339,22.859 ccw(c-47.554,22.522) -47.342,22.861 ; -47.344,22.863 ccw(c-48.079,21.676) -48.033,23.071 -48.14,23.075 cw(c-48.118,24.149) -49.107,23.73 cw(c-48.118,24.149) -48.203,25.221 cw(c-48.118,24.149) -48.108,25.224 -47.831,25.222 ccw(c-47.827,25.622) -47.827,25.222 -47.44,25.221 ccw(c-47.44,27.111) -45.55,27.111 -45.55,37.176 ccw(c-45.7,37.176) -45.698,37.326 -45.761,37.327 cw(c-45.734,39.202) -46.786,37.65 cw(c-45.734,39.202) -47.128,37.948 ; -47.344,22.862 cw(c-47.634,22.395) -47.342,22.861 ; v1(-40.25,-21.728) -39.982,-21.996 ccw(c-38.186,-20.2) -38.186,-22.74 -37.901,-22.74 ; -37.901,-22.74 v1(-37.301,-22.742) ; v1(-33.169,-23.55) -32.75,-23.55 cw(c-32.75,-25.3) v1(-31,-25.3) -19.984,-25.3 -19.96,-25.25 v1(-19.863,-25.25) ; v1(-14.194,-26.182) -14.198,-26.182 ccw(c-12.88,-26.182) -12.88,-27.5 v1(-5,-27.5)
  Bottom Layer w0.15: K51_D1.1@-78,-25.3 -78,-24.79 cw(c-75.46,-24.79) -75.46,-22.25 v1(-70.5,-22.25) ; v1(-57.018,-23.265) cw(c-57.063,-23.309) -57,-23.309 K41_D1.1@-57,-25.3 ; v1(-48.848,-16.435) -48.439,-16.002 cw(c-48.329,-16.105) -48.435,-15.999 -47.563,-15.127 ccw(c-48.72,-13.97) -47.084,-13.97 -47.084,-12.807 -47.534,-12.357 v1(-47.534,-12.323) ; v1(-48.507,-23.332) ccw(c-49.055,-22.783) -48.279,-22.783 v1(-48.279,-21.323) ; v1(-46.994,-23.193) cw(c-45.272,-24.916) -45.486,-22.489 cw(c-45.272,-24.916) -45.479,-22.489 -44.846,-22.489 cw(c-44.846,-22.639) -44.821,-22.491 ; -44.82,-22.491 cw(c-45,-23.5) -44.427,-22.65 ccw(c-44.344,-22.525) -44.345,-22.675 -42.249,-22.675 ccw(c-42.249,-20.135) -41.152,-22.426 ccw(c-41.217,-22.291) -41.079,-22.348 cw(c-40.5,-22.584) -40.881,-22.089 -40.621,-21.888 ccw(c-40.712,-21.769) -40.607,-21.876 -40.606,-21.875 cw(c-40.25,-22.231) v1(-40.25,-21.728) cw(c-41.252,-22.73) -39.835,-22.73 -39.835,-24.373 cw(c-40.712,-24.373) -40.712,-25.25 -41.879,-25.25 ccw(c-41.879,-25.421) K31_D1.1@-42,-25.3 ; v1(-37.301,-22.742) -36.725,-22.781 ccw(c-36.682,-22.157) -36.673,-22.782 -33.978,-22.742 cw(c-33.978,-23.55) v1(-33.169,-23.55) ; v1(-31,-25.3) K21_D1.1@-30,-25.3 ; v1(-19.863,-25.25) -19.046,-26.067 ccw(c-18,-25.02) -18,-26.5 -14.962,-26.5 ; K11_D1.1@-15,-25.3 cw(c-15.093,-25.393) -14.962,-25.393 -14.962,-26.5 ; v1(-14.194,-26.182) cw(c-14.962,-25.415) -14.962,-26.5 ; v1(-5,-27.5) cw(c-3.505,-28.995) -3.505,-26.881 -0.5,-26.881 ccw(c-0.5,-26.381) 0,-26.381 K01_D1.1@0,-25.3
R2: K02_D1.1 K12_D1.1 K22_D1.1 K32_D1.1 K42_D1.1 K52_D1.1 U1.2 | length 156.3
  Top Layer w0.15: v1(-68.75,-22.275) -66.914,-22.275 ccw(c-66.914,-22.125) -66.856,-22.263 -66.611,-22.161 cw(c-66.06,-23.475) -65.409,-22.208 -64.837,-22.5 -63.703,-22.5 ccw(c-63.704,-22.35) -63.568,-22.413 cw(c-63,-22.675) -62.432,-22.413 ccw(c-62.296,-22.35) -62.297,-22.5 -61.771,-22.5 -61.238,-22.5 ccw(c-61.238,-22.35) -61.144,-22.466 cw(c-59.983,-23.875) -58.917,-22.394 ccw(c-58.83,-22.272) -58.846,-22.421 -58.047,-22.499 ccw(c-58.032,-22.35) -58.032,-22.5 -57.755,-22.5 ccw(c-57.756,-22.35) -57.662,-22.467 cw(c-57.018,-23.265) -56.16,-22.705 ccw(c-56.035,-22.622) -56.036,-22.772 -54.429,-22.772 ccw(c-54.429,-22.131) v1(-53.975,-22.584) -51.81,-22.584 ccw(c-51.811,-22.434) -51.735,-22.563 cw(c-51,-23.784) -50.276,-22.556 -50.264,-22.564 ccw(c-50.189,-22.434) -50.189,-22.584 -49.265,-22.584 ccw(c-49.265,-22.434) -49.168,-22.549 cw(c-48.507,-23.332) -48.164,-22.365 ccw(c-48.115,-22.224) -48.055,-22.361 ; U1.2@-50.751,39.996 -50.145,39.996 cw(c-50.145,38.952) -49.351,39.631 cw(c-49.466,39.534) -49.316,39.542 ccw(c-48.242,39.599) -49.1,38.951 ccw(c-48.242,39.599) -48.727,38.639 -48.723,38.637 ccw(c-48.242,39.599) -48.242,38.524 ccw(c-48.242,39.599) -48.14,38.529 cw(c-48.103,38.131) -48.102,38.531 -47.348,38.531 cw(c-47.349,37.981) -46.913,38.316 cw(c-47.23,38.072) -46.911,38.313 ; v1(-48.247,-17.036) -48.247,-19.48 ccw(c-45.707,-19.48) -47.604,-21.168 -47.603,-21.17 ccw(c-47.492,-21.069) -47.597,-21.176 -47.596,-21.177 ccw(c-47.492,-21.069) -47.595,-21.178 v1(-47.187,-21.565) -47.182,-21.622 cw(c-47.332,-21.634) -47.226,-21.74 -47.53,-22.042 cw(c-47.636,-21.936) -47.543,-22.054 cw(c-49.096,-20.044) -47.545,-22.055 cw(c-49.096,-20.044) -48.054,-22.36 ; -46.91,38.312 ccw(c-45.734,39.202) -46.748,38.131 ccw(c-45.734,39.202) -45.754,37.727 ccw(c-45.734,39.202) -45.751,37.727 -45.692,37.726 cw(c-45.7,37.176) -45.15,37.176 -45.15,25.523 cw(c-45.881,25.523) -45.642,24.832 cw(c-45.69,24.974) -45.679,24.825 ccw(c-45.609,23.752) -45.881,24.792 ccw(c-45.609,23.752) -46.684,23.752 v1(-46.684,-12.323) ; v1(-32.617,-21.779) -31.275,-23.121 ccw(c-30.323,-22.169) -30.323,-23.515 v1(-27.259,-23.515) v1(-20.25,-23.515) ; v1(-12,-24.002) -6.01,-24.002 ccw(c-6.01,-22.341) -5.353,-23.866 ccw(c-5.412,-23.728) -5.329,-23.853 v1(-4.842,-23.528) ; v1(-3,-23.515) v1(1.5,-23.515)
  Bottom Layer w0.15: K52_D1.1@-69,-25.3 -69,-22.878 cw(c-68.146,-22.878) v1(-68.75,-22.275) ; K42_D1.1@-54,-25.3 ccw(c-54.06,-25.24) -53.975,-25.24 v1(-53.975,-22.584) ; v1(-48.247,-17.036) -47.837,-16.603 cw(c-47.728,-16.706) -47.834,-16.6 -47.662,-16.428 ccw(c-50.024,-14.066) -46.684,-14.066 v1(-46.684,-12.323) ; v1(-47.187,-21.565) -46.658,-21.31 ccw(c-46.723,-21.175) -46.652,-21.307 -46.651,-21.306 cw(c-46.58,-21.438) -46.63,-21.297 cw(c-46.159,-22.635) -46.629,-21.296 cw(c-46.159,-22.635) -46.159,-21.216 -42.947,-21.216 ccw(c-42.947,-18.771) v1(-41.217,-20.5) cw(c-41.217,-22.717) -39.835,-20.984 ccw(c-38.601,-19.75) -38.911,-21.467 ; K32_D1.1@-39,-25.3 -39,-21.681 cw(c-38.698,-21.681) -38.911,-21.467 ; v1(-32.617,-21.779) -33.006,-21.52 ccw(c-33.089,-21.645) -33.089,-21.495 -38.601,-21.495 cw(c-38.601,-19.75) -38.911,-21.467 ; v1(-27.259,-23.515) cw(c-27.885,-24.141) -27,-24.141 K22_D1.1@-27,-25.3 ; v1(-20.25,-23.515) -18.442,-23.515 ccw(c-18.442,-23.365) -18.356,-23.488 cw(c-18,-24.002) -17.643,-23.489 ccw(c-17.558,-23.365) -17.558,-23.515 -17.38,-23.515 ccw(c-17.38,-23.365) -17.31,-23.498 cw(c-16.365,-25.3) -16.365,-23.265 -14.571,-23.265 cw(c-14.571,-24.14) -13.998,-23.479 ccw(c-13.9,-23.365) -13.9,-23.515 -12.486,-23.515 cw(c-12.486,-24.002) v1(-12,-24.002) K12_D1.1@-12,-25.3 ; v1(-4.842,-23.528) -4.245,-23.515 cw(c-4.242,-23.665) -4.242,-23.515 v1(-3,-23.515) ; v1(1.5,-23.515) cw(c1.5,-25.015) 3,-25.015 K02_D1.1@3,-25.3
R3: K03_D1.1 K13_D1.1 K23_D1.1 K33_D1.1 K43_D1.1 K53_D1.1 K63_D1.1 U1.3 | length 165.4
  Top Layer w0.15: v1(-71.12,-23.04) -70.397,-23.129 cw(c-70.471,-23.75) -69.869,-23.583 ccw(c-69.725,-23.542) -69.749,-23.69 ccw(c-69.627,-22.905) -69.627,-23.7 -68.5,-23.7 -66.255,-23.7 ccw(c-66.255,-23.55) -66.116,-23.608 v1(-66.06,-23.475) ccw(c-64.551,-21.966) -65.836,-23.67 ccw(c-65.746,-23.55) -65.747,-23.7 -60.686,-23.7 ccw(c-60.687,-23.55) -60.551,-23.613 cw(c-59.983,-23.875) -59.416,-23.614 ccw(c-59.28,-23.55) -59.281,-23.7 -58.34,-23.7 cw(c-58.34,-27.389) -57.521,-23.792 -56.576,-24.005 ccw(c-56.543,-23.859) -56.543,-24.009 -51.543,-24.009 ccw(c-51.543,-23.241) v1(-51,-23.784) -49.15,-23.784 cw(c-49.15,-24.409) -49.14,-23.784 -48.989,-23.787 cw(c-48.991,-23.937) -48.901,-23.817 -48.885,-23.829 ccw(c-48.507,-23.332) -48.146,-23.842 -48.128,-23.829 cw(c-48.041,-23.952) -48.04,-23.802 -47.004,-23.818 ccw(c-46.994,-23.193) -46.937,-23.816 -46.595,-23.784 ccw(c-46.595,-22.814) v1(-45.909,-23.5) ccw(c-46.287,-23.122) -45.753,-23.122 -45.753,-22.161 ccw(c-45.903,-22.161) -45.763,-22.106 -45.796,-22.023 ccw(c-46.378,-22.251) -45.796,-22.021 -46.016,-21.466 ccw(c-46.528,-21.668) -46.08,-21.349 ccw(c-46.528,-21.668) -46.091,-21.334 ccw(c-46.409,-21.577) -46.093,-21.331 cw(c-43.18,-19.05) -46.424,-20.829 cw(c-43.18,-19.05) -46.759,-19.988 cw(c-43.18,-19.05) -46.878,-18.923 cw(c-43.18,-19.05) -46.868,-18.756 cw(c-43.18,-19.05) -46.845,-18.545 ccw(c-46.994,-18.525) -46.844,-18.525 ccw(c-46.994,-18.525) -46.888,-18.42 -47.233,-18.074 cw(c-47.126,-17.969) -47.235,-18.072 ; U1.3@-48.242,39.599 -47.527,39.599 cw(c-47.527,38.804) -46.821,39.168 cw(c-46.954,39.1) -46.805,39.113 ccw(c-45.734,39.202) -46.732,38.804 ccw(c-45.734,39.202) -45.761,38.127 ccw(c-45.734,39.202) -45.748,38.127 cw(c-45.754,37.727) -45.746,38.127 cw(c-45.751,37.727) -45.743,38.127 -45.687,38.126 cw(c-45.7,37.176) -44.75,37.176 -44.75,37.069 -44.75,36.228 -44.75,26.771 ccw(c-44.6,26.771) -44.586,26.622 cw(c-44.525,26) -43.9,26 -43.9,24.127 cw(c-44.05,24.128) -43.933,24.034 ccw(c-43.1,23.355) -44.166,23.494 ccw(c-43.1,23.355) -44.175,23.381 cw(c-44.325,23.385) -44.176,23.363 cw(c-44.997,23.494) -44.997,22.662 -45.837,22.662 ccw(c-45.813,22.514) -45.851,22.659 ccw(c-45.703,22.098) -46.284,22.098 -46.284,-11.84 -45.834,-12.29 v1(-45.834,-12.323) ; v1(-47.622,-17.638) -47.238,-18.068 ccw(c-47.126,-17.969) -47.236,-18.071 ; v1(-40.5,-22.584) -40.238,-22.846 ccw(c-38.442,-21.05) -38.442,-23.59 v1(-36.688,-23.59) ; v1(-32,-26.5) v1(-24.13,-26.5) -20.25,-26.5 v1(-20.238,-26.514) ; v1(-9,-23.377) -6.106,-23.377 ccw(c-6.106,-23.227) -6.047,-23.364 -5.088,-22.954 cw(c-4.842,-23.528) -5.045,-22.937 v1@-4.501,-22.75
  Bottom Layer w0.15: K63_D1.1@-75,-25.3 cw(c-72.74,-25.3) -72.74,-23.04 v1(-71.12,-23.04) ; v1(-66.06,-23.475) -66.06,-25.154 ccw(c-65.854,-25.154) K53_D1.1@-66,-25.3 ; K43_D1.1@-51,-25.3 v1(-51,-23.784) ; v1(-47.622,-17.638) -47.227,-17.186 ; -47.227,-17.185 ccw(c-50.024,-14.703) -47.226,-17.184 ccw(c-50.024,-14.703) -46.284,-14.703 -46.284,-12.807 -45.834,-12.357 v1(-45.834,-12.323) ; v1(-45.909,-23.5) -45.487,-23.1 cw(c-45.384,-23.209) -45.471,-23.087 ccw(c-46.064,-22.251) -45.348,-22.984 cw(c-45.243,-23.092) -45.32,-22.963 cw(c-45,-23.5) -45.148,-22.893 cw(c-45.113,-23.039) -45.114,-22.889 -44.886,-22.889 cw(c-44.887,-23.039) -44.853,-22.893 ; -44.852,-22.893 cw(c-45,-23.5) -44.58,-23.037 ccw(c-44.48,-22.925) -44.481,-23.075 -41.685,-23.075 ccw(c-41.685,-21.399) v1(-40.5,-22.584) ; v1(-36.688,-23.59) -37.289,-23.631 ccw(c-36.962,-24.484) -37.875,-24.484 ccw(c-37.25,-24.484) -37.503,-25.056 -36.95,-25.3 K33_D1.1@-36,-25.3 ccw(c-35.918,-25.3) -35.976,-25.358 -35.234,-26.1 ccw(c-34.268,-25.134) -34.268,-26.5 v1(-32,-26.5) ; v1(-24.13,-26.5) -24.13,-25.614 cw(c-23.686,-25.614) K23_D1.1@-24,-25.3 ; v1(-20.238,-26.514) -19.191,-26.514 cw(c-19.191,-26.664) -19.103,-26.542 ccw(c-18,-25.02) -18,-26.9 -13.97,-26.9 ccw(c-13.97,-26.5) -13.865,-26.886 cw(c-13.825,-27.031) -13.825,-26.881 -11.633,-26.881 ccw(c-11.633,-24.341) -9.837,-26.137 K13_D1.1@-9,-25.3 v1(-9,-23.377) ; v1(-4.5,-22.75) 3.46,-22.75 cw(c3.46,-25.29) 6,-25.29 K03_D1.1@6,-25.3
R4: K14_D1.1 K24_D1.1 K44_D1.1 K54_D1.1 K64_D1.1 U1.4 | length 160.9
  Top Layer w0.15: v1(-69.5,-21.5) -69.5,-22.621 ccw(c-69.35,-22.62) -69.453,-22.729 ccw(c-67.998,-21.16) -69.244,-22.9 -67.377,-22.9 ; -67.376,-22.9 -66.984,-22.9 ccw(c-66.985,-22.75) -66.867,-22.843 cw(c-66.06,-23.475) -66.825,-22.792 cw(c-66.06,-23.475) -65.212,-22.9 -63.543,-22.9 ccw(c-63.543,-22.132) v1(-63,-22.675) ccw(c-62.457,-22.132) -62.457,-22.9 -61.085,-22.9 ccw(c-61.086,-22.75) -60.981,-22.857 cw(c-59.983,-23.875) -59.077,-22.775 ccw(c-58.983,-22.659) -58.998,-22.808 -58.066,-22.899 ccw(c-58.052,-22.75) -58.052,-22.9 -57.597,-22.9 ccw(c-57.598,-22.75) -57.486,-22.85 cw(c-57.018,-23.265) -56.415,-23.1 ccw(c-56.271,-23.059) -56.272,-23.209 -53.189,-23.209 cw(c-53.189,-23.609) -53.188,-23.209 -51.924,-23.209 ccw(c-51.925,-23.059) -51.807,-23.152 cw(c-51,-23.784) -50.48,-22.901 -50.372,-22.964 ccw(c-50.297,-22.834) -50.297,-22.984 -49.101,-22.984 ccw(c-49.101,-22.834) -48.986,-22.931 cw(c-48.507,-23.332) -48.196,-22.789 ccw(c-48.122,-22.659) -48.071,-22.799 ccw(c-49.096,-20.044) -47.269,-22.347 cw(c-46.644,-22.972) -46.644,-22.089 v1(-46.445,-22.089) ; v1(-47.511,-18.681) cw(c-48.359,-19.529) -47.297,-18.97 cw(c-47.43,-19.04) -47.28,-19.04 ccw(c-43.18,-19.05) -47.159,-20.038 ccw(c-43.18,-19.05) -46.73,-21.101 ccw(c-43.18,-19.05) -46.453,-21.519 ccw(c-43.18,-19.05) -46.409,-21.577 cw(c-46.528,-21.668) -46.378,-21.668 v1@-46.378,-22.089 ; U1.4@-45.734,39.202 cw(c-45.734,37.718) -44.25,37.718 -44.25,27.095 ccw(c-44.1,27.095) -44.155,26.956 cw(c-44.525,26) -43.5,26 -43.5,24.553 ccw(c-43.35,24.554) -43.32,24.407 cw(c-43.1,23.355) -42.029,23.268 ; v1(-44.984,-12.323) -44.984,-12.29 -45.884,-11.39 -45.884,21.263 cw(c-44.862,21.263) -45.095,22.258 cw(c-45.061,22.112) -45.062,22.262 -44.997,22.262 ccw(c-44.997,23.494) -44.785,22.281 -44.774,22.283 cw(c-44.748,22.135) -44.749,22.285 ; -44.748,22.285 -43.104,22.28 ccw(c-43.1,23.355) -42.99,22.285 ccw(c-43.1,23.355) -42.292,22.645 ccw(c-43.1,23.355) -42.025,23.329 ; v1(-41.085,-21.368) -40.466,-21.141 cw(c-40.25,-21.728) -39.748,-21.355 -39.645,-21.493 ; -39.643,-21.496 -39.136,-22.064 ccw(c-39.024,-21.965) -39.024,-22.115 -37.305,-22.115 cw(c-37.305,-22.265) -37.288,-22.116 ccw(c-37.215,-21.495) -37.257,-22.118 v1(-36.682,-22.157) ; v1(-32.695,-22.845) -31.672,-23.44 cw(c-32.75,-25.3) -31.477,-23.568 cw(c-32.75,-25.3) -30.982,-24.076 ccw(c-30.859,-23.99) -30.86,-24.14 v1(-21,-24.14) ; v1(-14.096,-22.608) v1(-6.5,-22.608)
  Bottom Layer w0.15: K64_D1.1@-81,-25.3 -79.8,-25.3 ccw(c-79.8,-24.5) -79,-24.5 -79,-24.04 cw(c-76.46,-24.04) -77.369,-21.668 ; -77.368,-21.668 cw(c-77.316,-21.809) -77.263,-21.668 -77.199,-21.692 ccw(c-76.2,-19.05) -74.827,-21.519 cw(c-74.754,-21.65) -74.754,-21.5 v1(-69.5,-21.5) ; K54_D1.1@-63,-25.3 v1(-63,-22.675) ; K44_D1.1@-48,-25.3 -48,-23.743 cw(c-47.85,-23.743) -47.977,-23.664 ccw(c-48.507,-23.332) -47.902,-23.175 cw(c-47.756,-23.138) -47.896,-23.085 ; -47.896,-23.084 cw(c-46.445,-23.644) v1(-46.445,-22.089) -42.825,-22.089 ccw(c-42.825,-19.627) v1(-41.085,-21.368) ; v1(-47.511,-18.681) -47.069,-18.239 ; -47.068,-18.238 ccw(c-49.929,-15.378) -45.884,-15.378 -45.884,-13.223 -45.609,-12.948 -45.575,-12.948 -44.984,-12.357 v1(-44.984,-12.323) ; v1(-36.682,-22.157) -33.383,-22.157 cw(c-33.383,-22.845) v1(-32.695,-22.845) ; K24_D1.1@-21,-25.3 v1(-21,-24.14) -21,-23.608 cw(c-20.194,-23.608) -20.194,-22.802 -14.563,-22.802 ccw(c-14.563,-22.141) v1(-14.096,-22.608) ; v1(-6.5,-22.608) cw(c-7.707,-23.815) -6,-23.815 K14_D1.1@-6,-25.3